# Altium PCB rtm-damp-dvb.PcbDoc (part 2 of 3)
Units mm, origin at the board's own origin, x right, y up, seen from the top; angles counter-clockwise.
Board outline 152.4 x 101.6 mm, 4 copper layers (Top Layer, GND, Vcc, Bottom Layer), stack 0.777 mm thick; 196 components, 95 nets, 559 pads, 90 vias.
Unrouted connection lines stored in the file: 129.
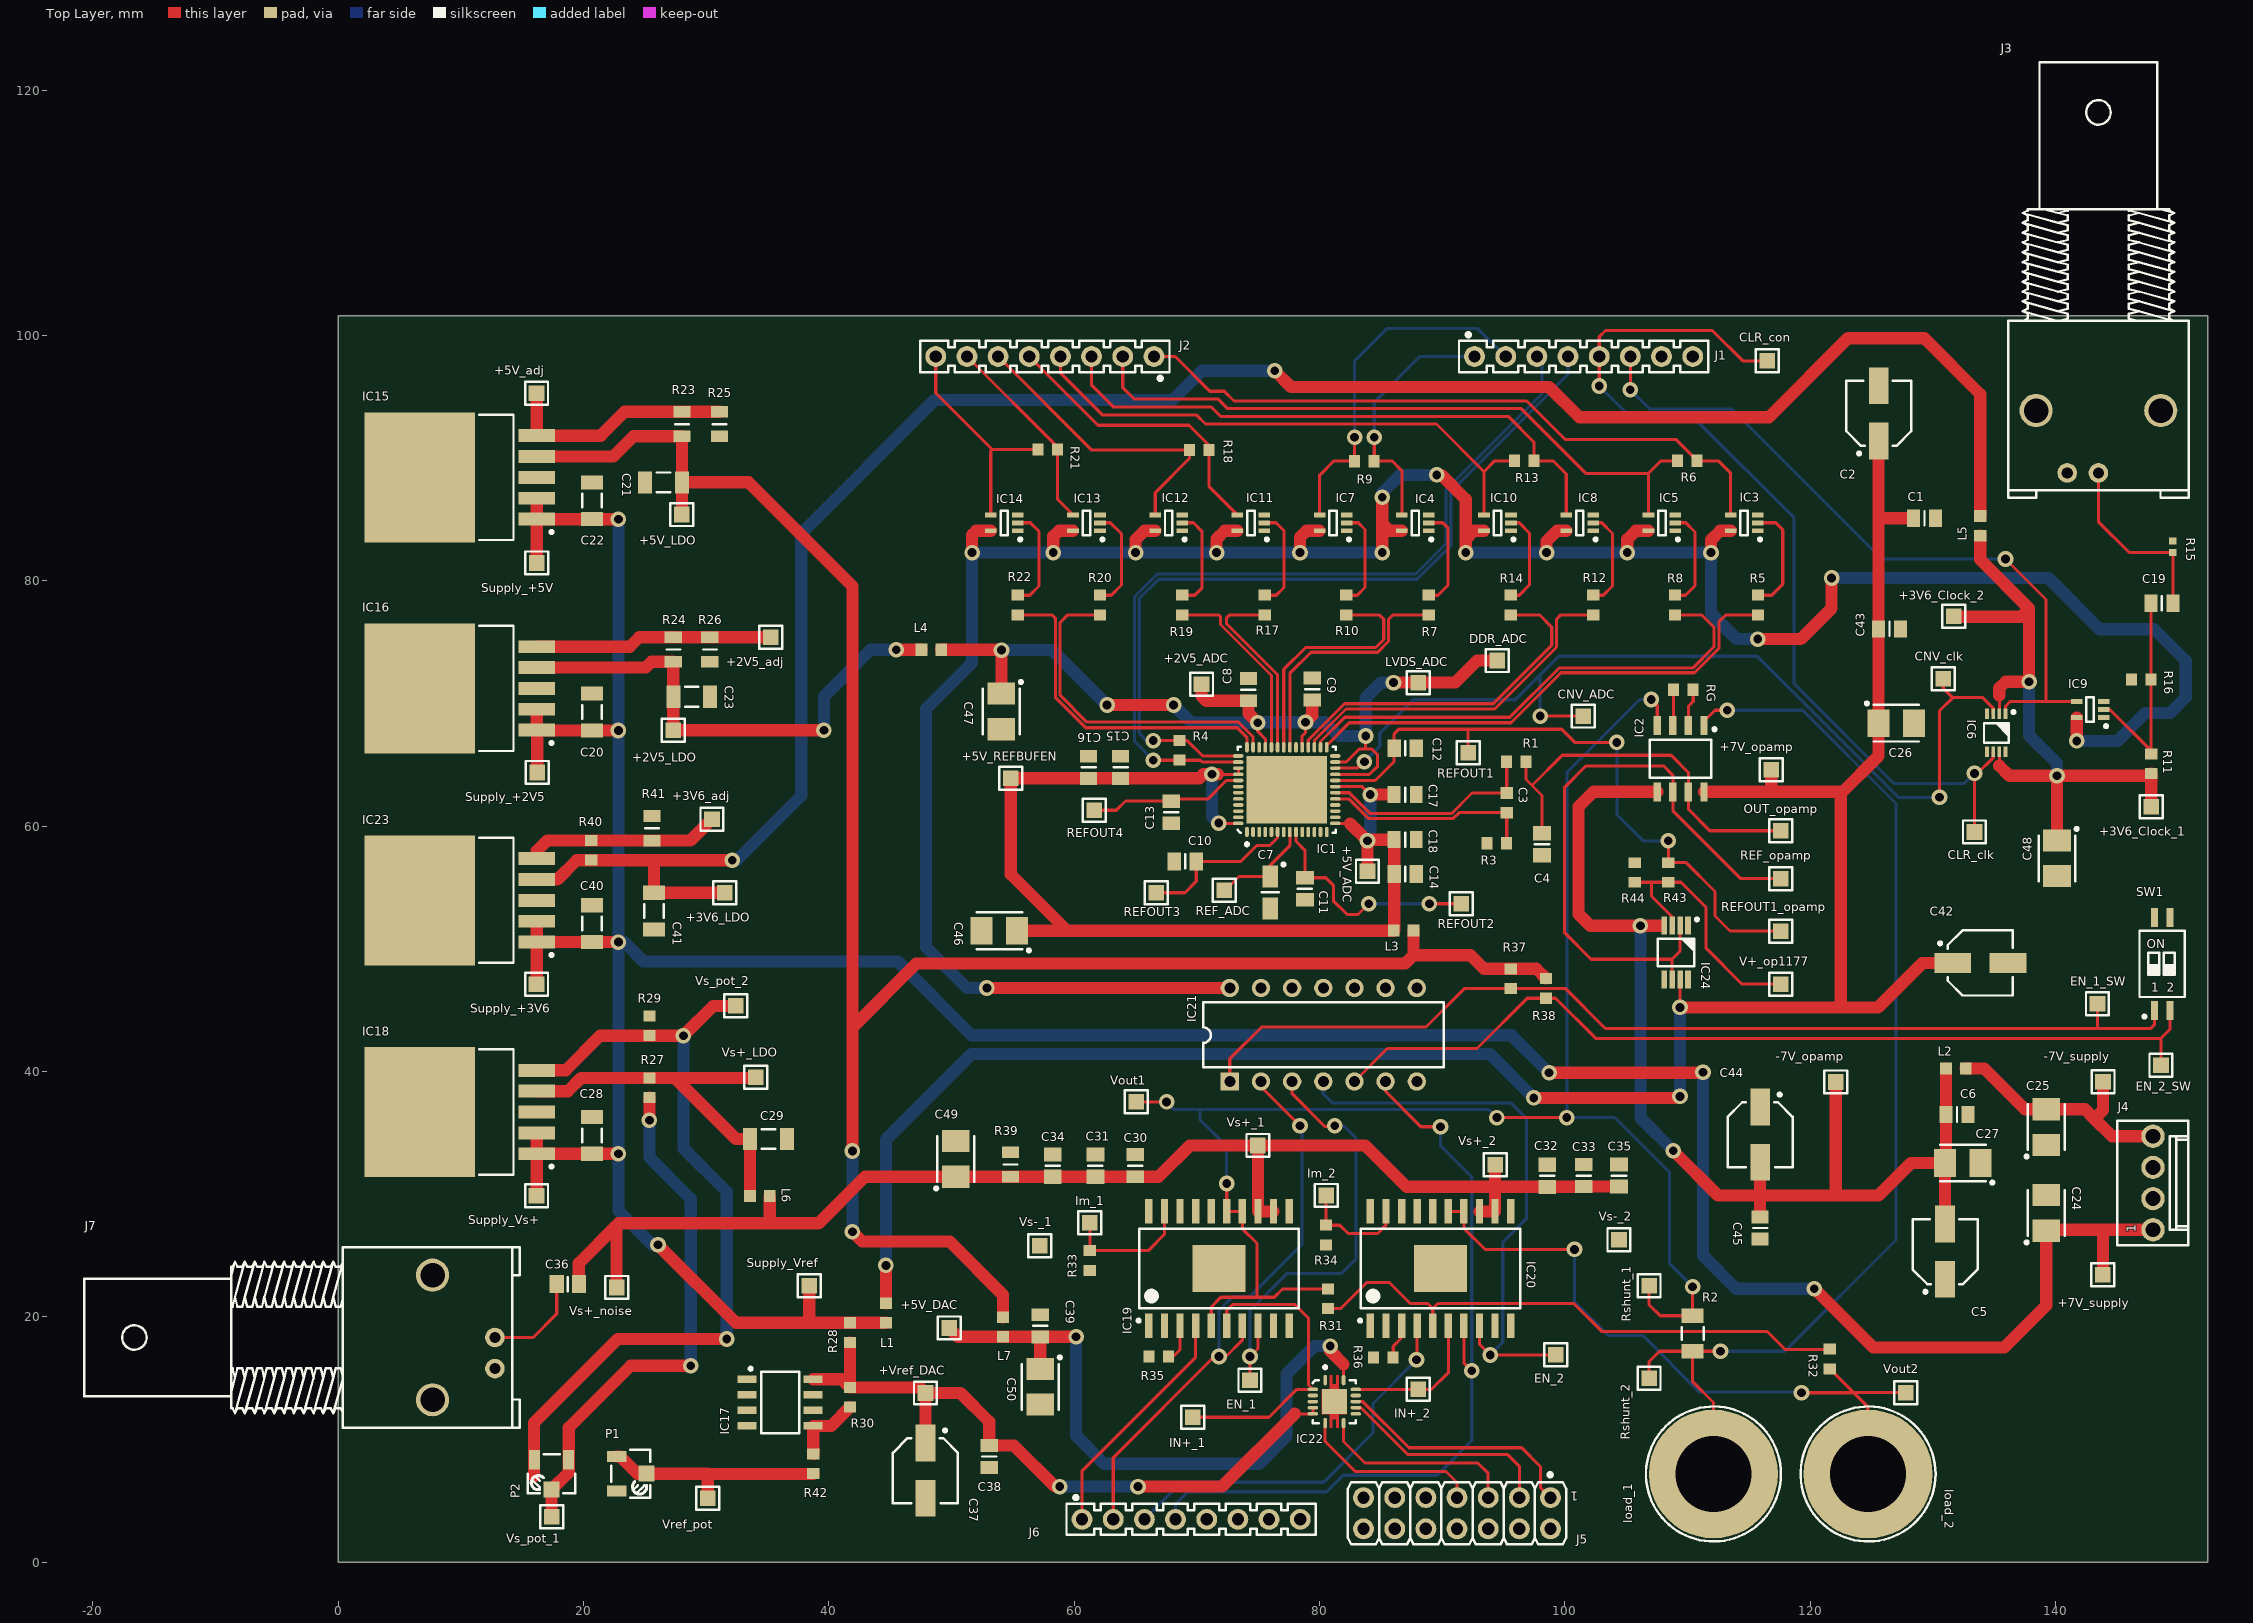
[diagram p0: Top Layer view]

## Part data (continued)
R37 R38: library part R0603_560K_1%_0.1W_100PPM, "Resistor - 1%", Case=0603, Manufacturer=GENERIC, Manufacturer1 ComponentHeight=0.55mm, Manufacturer1 Example="NIC COMPONENT", Manufacturer1 Part Number=NRC06F5603TRF, Power=0.1W, Tolerance=±1%, Author="CERN DEM JLC", Component Type=Standard, CreateDate=03/12/2007, HelpURL=\\cern.ch\dfs\Applications\Altium\Datasheets\R0603_NIC_NRC.pdf, LatestRevisionDate=13/03/2008, Manufacturer Part Number=R0603_560K_1%_0.1W_100PPM, Mounted=Yes, Part Description="General Purpose Thick Film Chip Resistor", Part Number=R0603_560K_1%_0.1W_100PPM, Pin Count=2, Sense=No, SMD=Yes, Socket=No, Status=Preferred, TC=±100ppm/°C
R39: library part R0805_75R_0.1%_0.1W_10PPM, "Resistor - 0.1%", Case=0805, Manufacturer=GENERIC, Manufacturer1 ComponentHeight=0.6mm, Manufacturer1 Example="TYCO HOLSWORTHY", Manufacturer1 Part Number=RN73C2A75RBTG, Power=0.1W, Tolerance=±0.1%, Author="CERN DEM JLC", Component Type=Standard, CreateDate=03/12/2007, HelpURL=\\cern.ch\dfs\Applications\Altium\Datasheets\R0805_Tyco_RN73.pdf, LatestRevisionDate=13/03/2008, Manufacturer Part Number=R0805_75R_0.1%_0.1W_10PPM, Mounted=Yes, Part Description="Thin Film Chip Resistor", Part Number=R0805_75R_0.1%_0.1W_10PPM, Pin Count=2, Sense=No, SMD=Yes, Socket=No, Status="Not recommended", TC=±10ppm
R40: library part R0603_3K_1%_0.1W_100PPM, "Resistor - 1%", Case=0603, Manufacturer=GENERIC, Manufacturer1 ComponentHeight=0.55mm, Manufacturer1 Example="NIC COMPONENT", Manufacturer1 Part Number=NRC06F3001TRF, Power=0.1W, Tolerance=±1%, Author="CERN DEM JLC", Component Type=Standard, CreateDate=03/12/2007, HelpURL=\\cern.ch\dfs\Applications\Altium\Datasheets\R0603_NIC_NRC.pdf, LatestRevisionDate=13/03/2008, Manufacturer Part Number=R0603_3K_1%_0.1W_100PPM, Mounted=Yes, Part Description="General Purpose Thick Film Chip Resistor", Part Number=R0603_3K_1%_0.1W_100PPM, Pin Count=2, Sense=No, SMD=Yes, Socket=No, Status=Preferred, TC=±100ppm/°C
R42: library part R0603_200K_1%_0.1W_100PPM, "Resistor - 1%", Case=0603, Manufacturer=GENERIC, Manufacturer1 ComponentHeight=0.55mm, Manufacturer1 Example="NIC COMPONENT", Manufacturer1 Part Number=NRC06F2003TRF, Power=0.1W, Tolerance=±1%, Author="CERN DEM JLC", Component Type=Standard, CreateDate=03/12/2007, HelpURL=\\cern.ch\dfs\Applications\Altium\Datasheets\R0603_NIC_NRC.pdf, LatestRevisionDate=13/03/2008, Manufacturer Part Number=R0603_200K_1%_0.1W_100PPM, Mounted=Yes, Part Description="General Purpose Thick Film Chip Resistor", Part Number=R0603_200K_1%_0.1W_100PPM, Pin Count=2, Sense=No, SMD=Yes, Socket=No, Status=Preferred, TC=±100ppm/°C
R43 R44: library part R0603_1K_0.1%_0.3W_0.2PPM_VISHAY_Y40211K00000T9R, "Resistor - 0.1%", Case=0603, Manufacturer="VISHAY PRECISION", Manufacturer Part Number=Y40211K00000T9R, Power=0.3W, Tolerance=±0.1%, Author="CERN DEM JLC", ComponentHeight=0.64mm, Component Type=Standard, CreateDate=14/07/2011, HelpURL=\\cern.ch\dfs\Applications\Altium\Datasheets\R0603_VISHAY_FRSM.pdf, LatestRevisionDate=14/07/2011, Mounted=Yes, Part Description="Z-1 Foil Ultra High Precision Wrap-around Chip Resistor (FRSM Series)", Part Number=R0603_1K_0.1%_0.3W_0.2PPM_VISHAY_Y40211K00000T9R, Pin Count=2, Sense=No, SMD=Yes, Socket=No, Status="Not Recommended", TC=±0.2ppm/°C
RG: library part R0603_0R_JUMPER, "Resistor", Case=0603, Manufacturer=GENERIC, Manufacturer1 ComponentHeight=0.55mm, Manufacturer1 Example="NIC COMPONENT", Manufacturer1 Part Number=NRC06Z0, Author="CERN DEM JLC", Component Type=Standard, CreateDate=03/12/2007, HelpURL=\\cern.ch\dfs\Applications\Altium\Datasheets\R0603_NIC_NRC.pdf, LatestRevisionDate=13/03/2008, Manufacturer Part Number=R0603_0R_JUMPER, Mounted=Yes, Part Description="1A (0.05R Max DC Resistance) Zero Ohm Jumper", Part Number=R0603_0R_JUMPER, Pin Count=2, Sense=No, SMD=Yes, Socket=No, Status=Preferred
SW1: library part SW_TYCO_1571983-1, "2 Ways SPST DIP Switch", Manufacturer=TYCO, Manufacturer Part Number="1571983-1 or GDH02S04", Author="CERN DEM JLC", ComponentHeight=2.31mm, Component Type=Standard, CreateDate=08/01/2009, Family=Switch, HelpURL=\\cern.ch\dfs\Applications\Altium\Datasheets\SW_TYCO_1571983-1.pdf, LatestRevisionDate=08/01/2009, Mounted=Yes, PackageDescription="Pitch 1.27mm,  Body3.66x6.2mm, 2 Ways SPST Surface-Mount DIP Switch, TYCO GDH Serie", Part Description="2 Way SPST SMD DIP Switch, Latched, Contact Rating 0.025A 24VDC", Part Number=SW_TYCO_1571983-1, Pin Count=4, PressFit=No, Sense=No, SMD=Yes, Socket=No, Status=None

## Via types
v1: diameter 1.27, hole 0.711, Top Layer to Bottom Layer, 90 vias

## Nets (pads, with @x,y where several pads share a name; then routed paths per layer and width w, separated by ;. In a path a pad name is that pad's centre, name@x,y a point inside that pad or via, vN(x,y) a via of type N, cw(c..) or ccw(c..) an arc to the next point about the centre after c; other vN are vias at no path point)
+2V5: +2V5_LDO.1 C23.2 IC16.4 L4.1 R24.2 | length 41.4
  Top Layer w1: IC16.4@16.2,72.925 25.075,72.925 25.55,73.4 R24.2@27.325,73.4 C23.2@27.325,70.55 +2V5_LDO.1@27.325,67.825 v1(39.6,67.825) ; v1(45.5,74.375) L4.1@47.55,74.375
  Bottom Layer w1: v1(39.6,67.825) 39.6,70.575 43.4,74.375 v1(45.5,74.375)